# Altium PCB PCB.PcbDoc
Units mm, origin at the board's own origin, x right, y up, seen from the top; angles counter-clockwise.
Board outline 38 x 49 mm, 4 copper layers (Top, Signal Layer 1, Internal Plane 1, Bottom), stack 1.58 mm thick; 44 components, 33 nets, 157 pads, 156 vias.
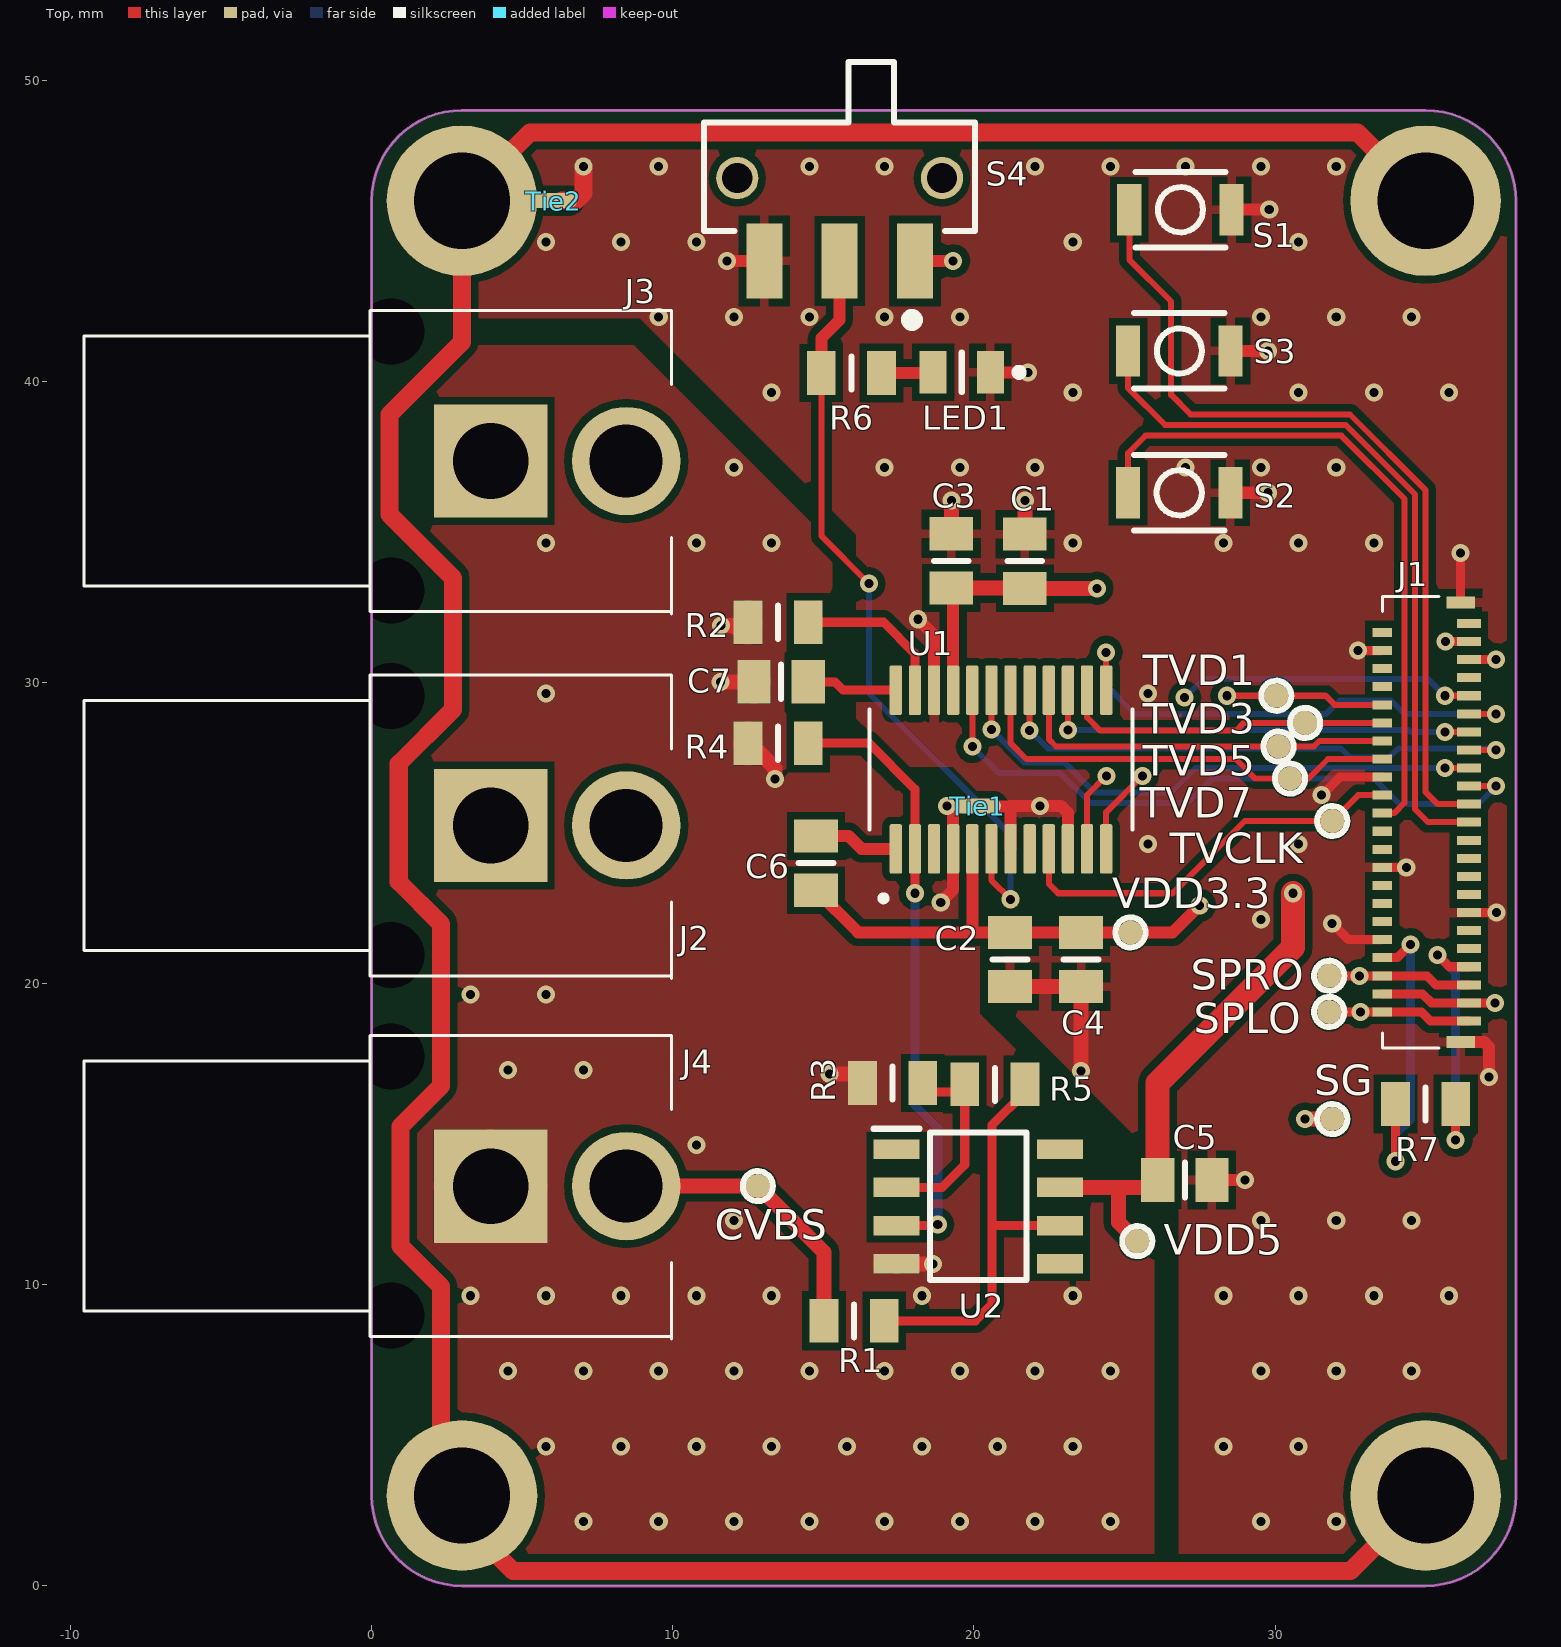
[diagram p0: Top view]
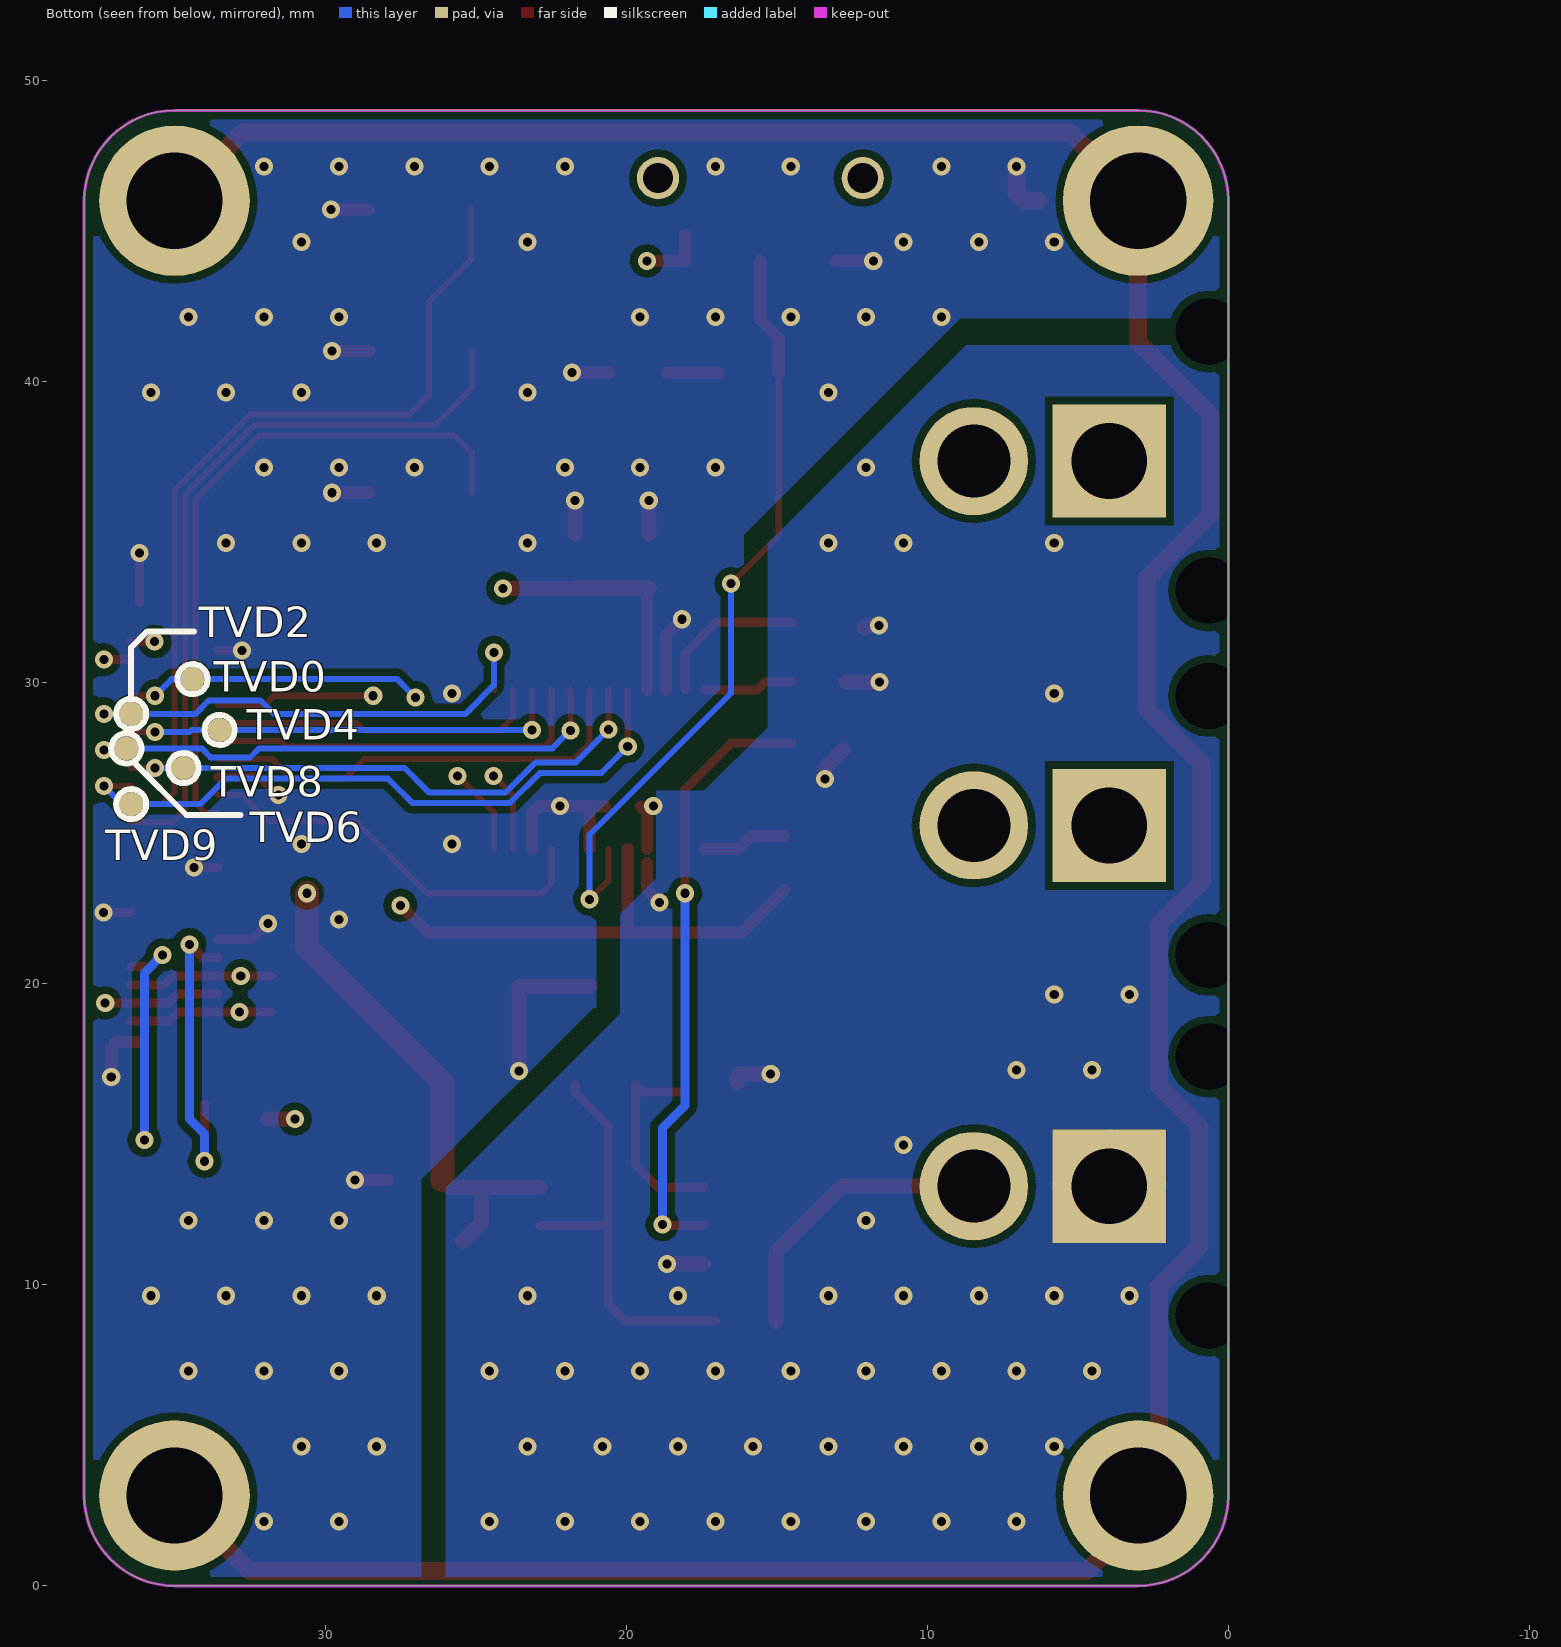
[diagram p1: Bottom view, seen from below]
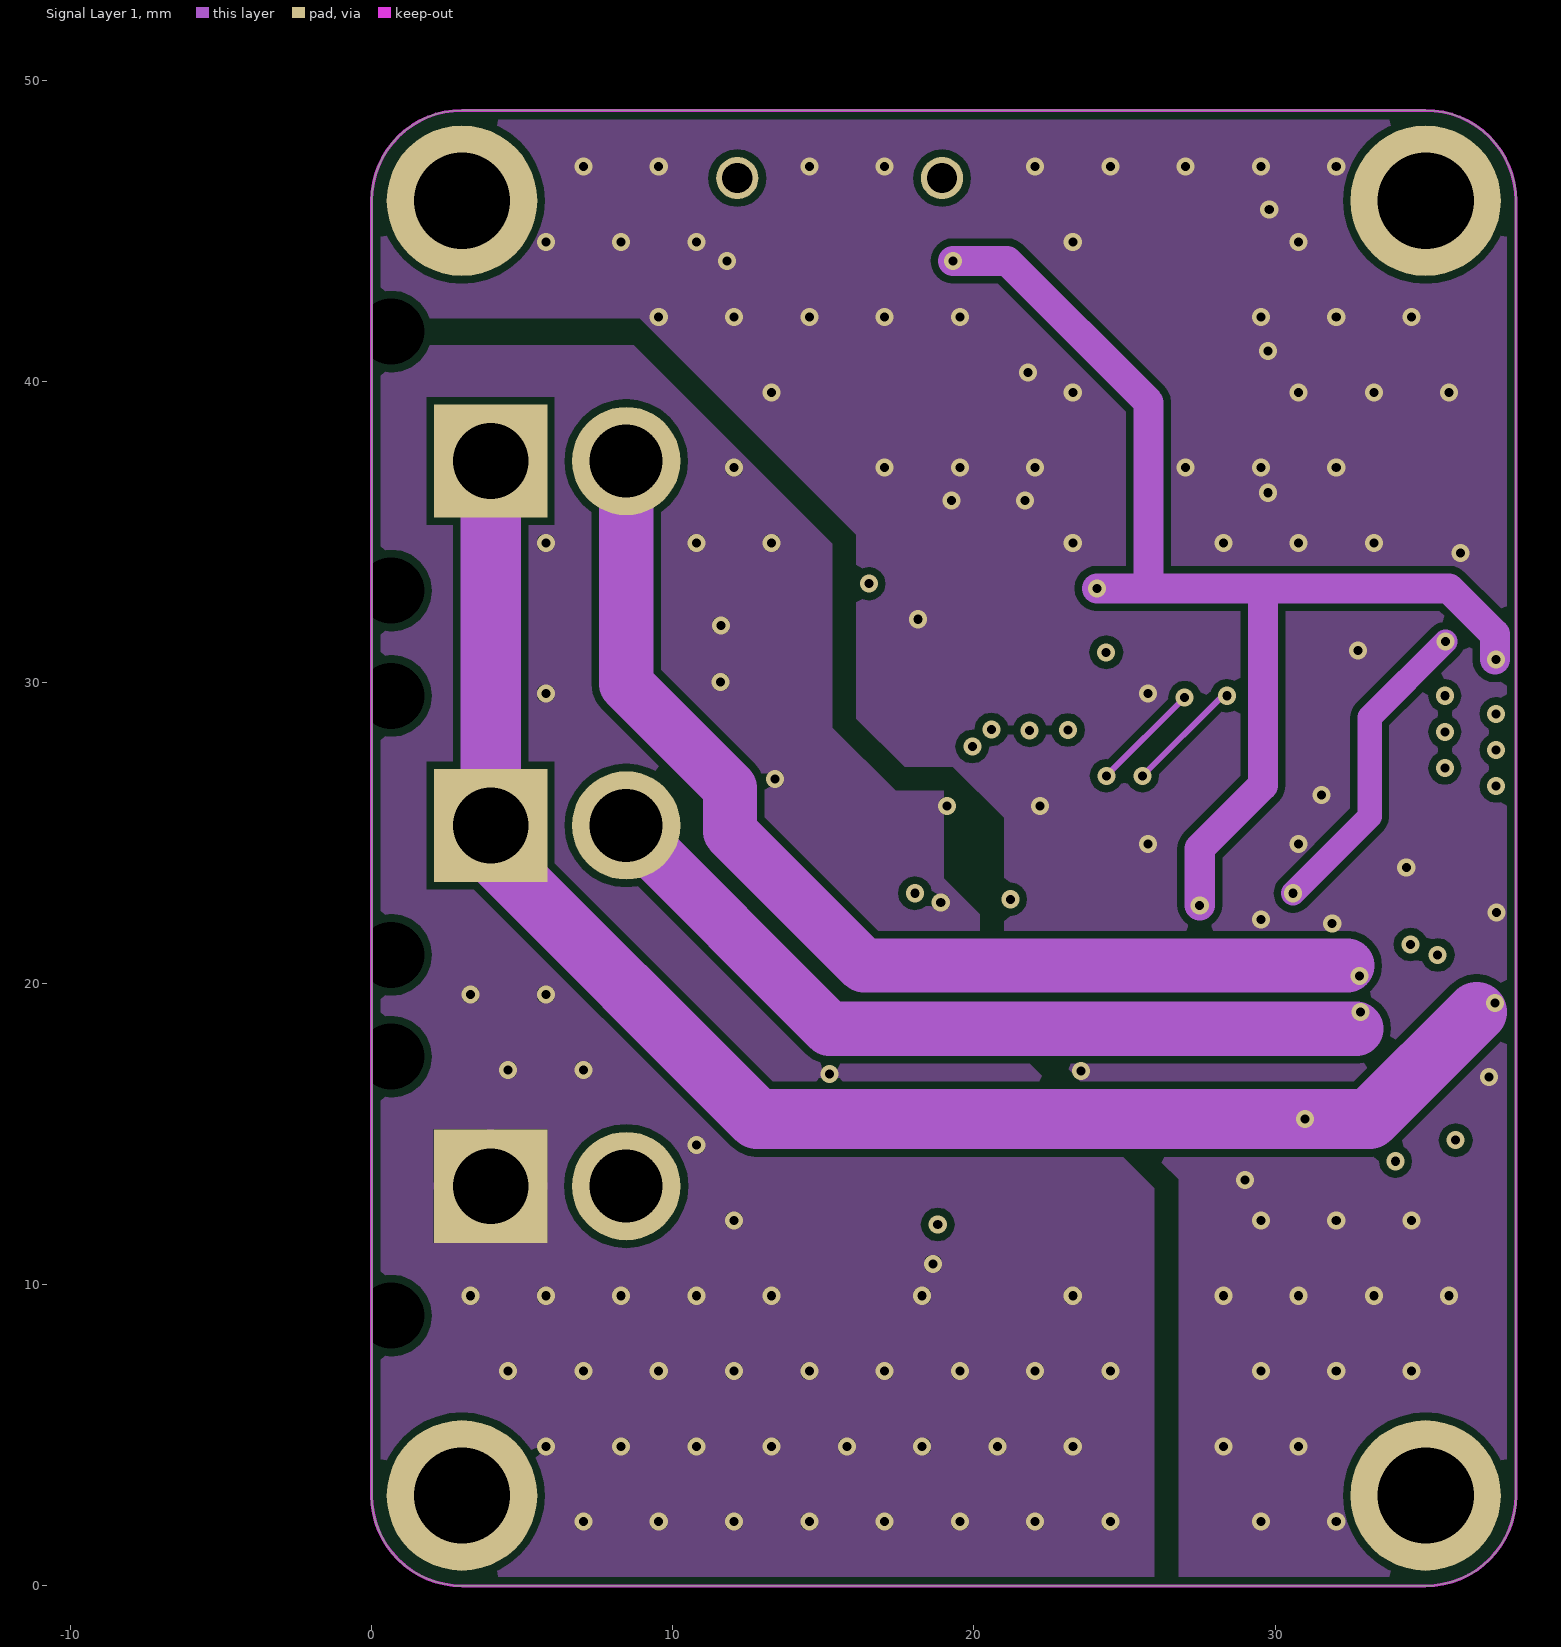
[diagram p2: Signal Layer 1]
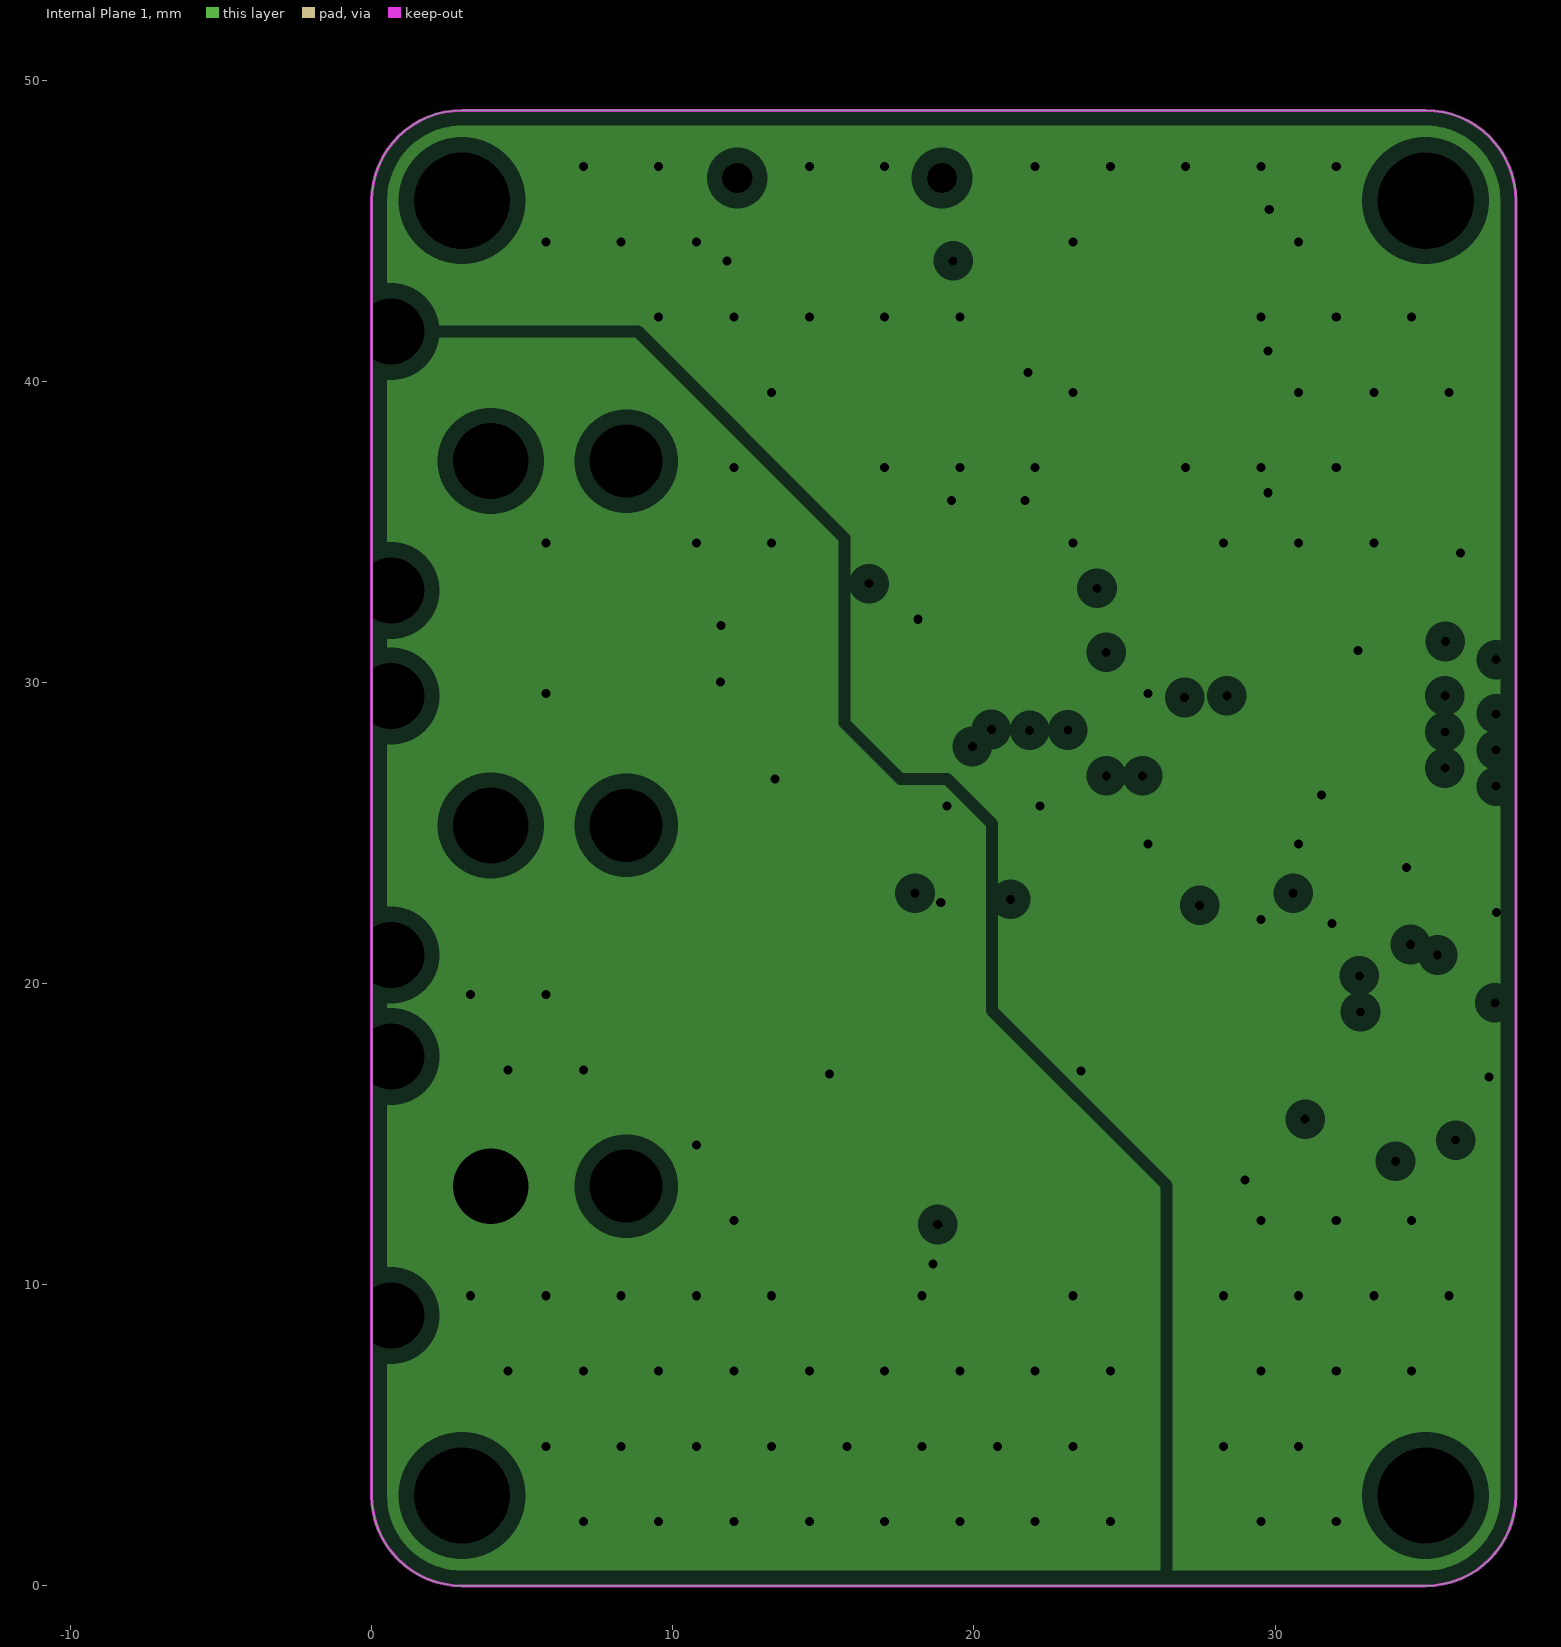
[diagram p3: Internal Plane 1, clearances drawn from the general rule]
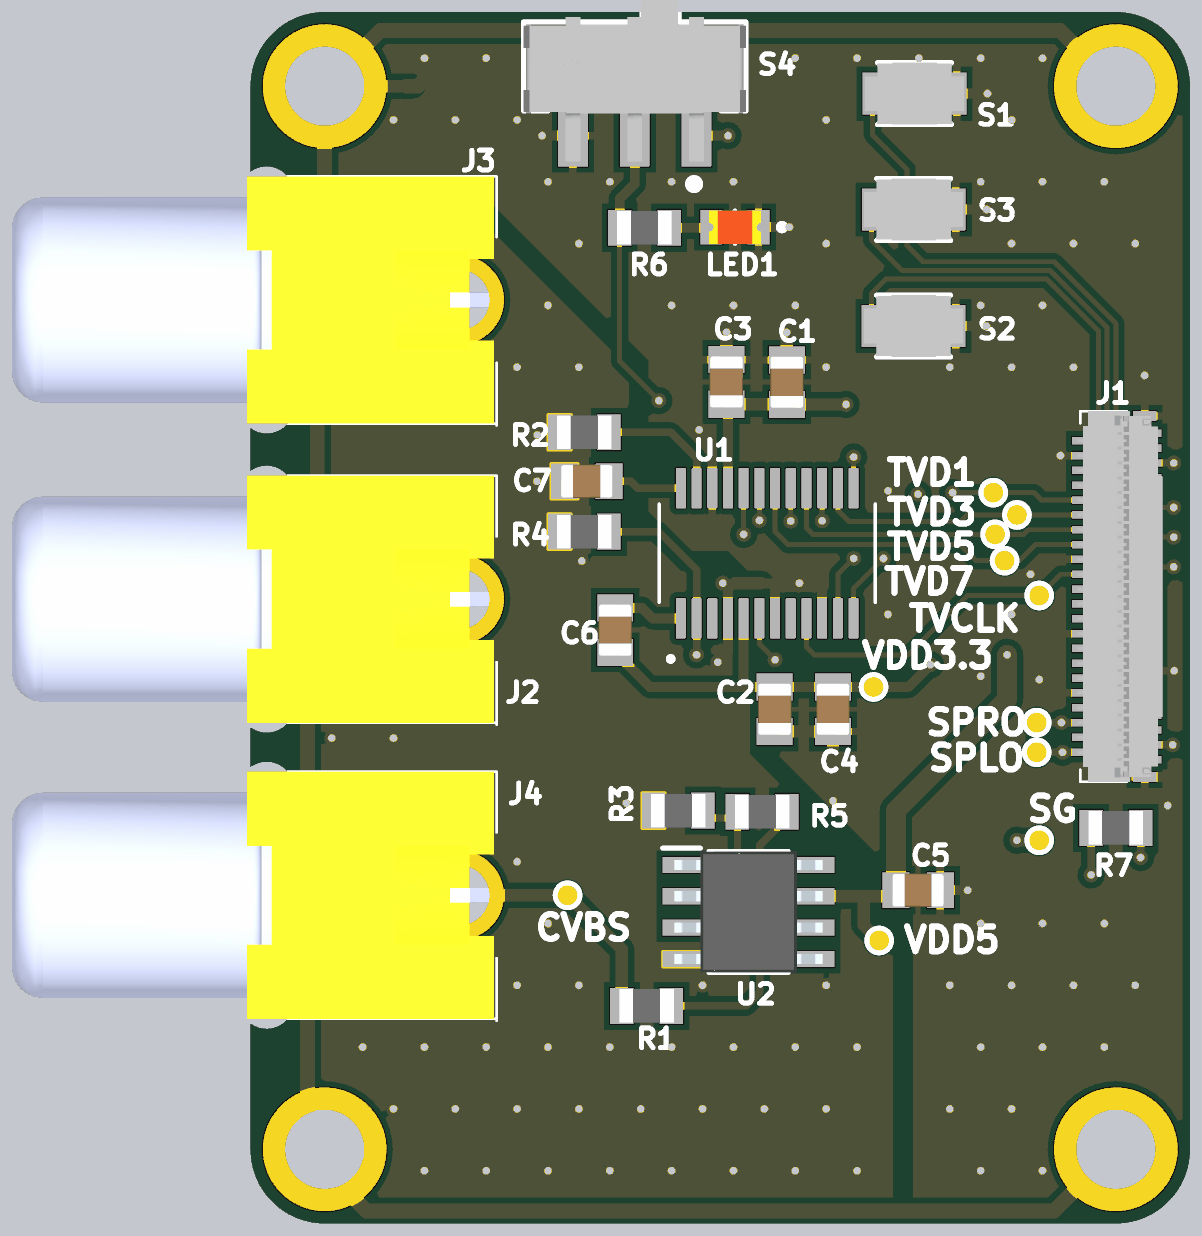
[diagram p4: 3D render of the assembled board from above, using the file's embedded part models]

## Layer stack, top to bottom
Top Solder: solder mask 0.01, Solder Resist, Dk 3.5
Top: signal copper 0.035
Dielectric 1: prepreg 0.22, FR-4, Dk 4.2
Signal Layer 1: signal copper 0.035
Dielectric 3: core 1, Dk 4.2
Internal Plane 1: plane copper 0.035, net (Multiple Nets)
Dielectric 2: prepreg 0.22, Dk 4.2
Bottom: signal copper 0.035
Bottom Solder: solder mask 0.01, Solder Resist, Dk 3.5

## Board outline
0,3 0,46 cw(c3,46) 3,49 35,49 cw(c35,46) 38,46 38,3 cw(c35,3) 35,0 3,0 cw(c3,3)

## Design rules (kind name [scope] priority, off if disabled: settings)
Clearance Clearance_Keep [IsPad vs OnLayer('Keep-Out Layer')] p1: gap=0 ignorepadtopadclearanceinfootprint=FALSE
Clearance [All] p2: gap=0.15 ignorepadtopadclearanceinfootprint=FALSE except(0.25: Arc-Poly Track-Poly SMDPad-Poly THPad-Poly Via-Poly Fill-Poly; 0.4: Poly-Poly)
ComponentClearance [All] p1 off: gap=0.254 collisioncheckmode=3 verticalgap=0.254 showdistances=FALSE
HoleSize [All] p1 off: absolutevalues=TRUE maxlimit=2.54 minlimit=0.025 maxpercent=80.000 minpercent=20.000
MinimumSolderMaskSliver [All] p1 off: minsoldermaskwidth=0.1
PlaneClearance [All] p1: clearance=0.508
PlaneConnect PlaneConnect_GND_M [InNet('GND_M')] p1: planeconnectstyle=Direct reliefexpansion=0.508 reliefentries=4 reliefconductorwidth=0.254 reliefairgap=0.254
PlaneConnect [All] p2: pad.planeconnectstyle=Relief pad.reliefexpansion=0.4 pad.reliefentries=4 pad.reliefconductorwidth=0.5 pad.reliefairgap=0.3 via.planeconnectstyle=Direct via.reliefexpansion=0.508 via.reliefentries=4 via.reliefconductorwidth=0.254 via.reliefairgap=0.254
PolygonConnect PolygonConnect_VBUS [InNet('VBUS')] p1: connectstyle=Direct reliefconductorwidth=0.3 reliefentries=4 polygonreliefangle="90 Angle" airgapwidth=0.25
PolygonConnect PolygonConnect_GND_M [InNet('GND_M')] p2: connectstyle=Direct reliefconductorwidth=0.3 reliefentries=4 polygonreliefangle="90 Angle" airgapwidth=0.25
PolygonConnect PolygonConnect_GND [InNet('GND')] p3: thpad.connectstyle=Relief thpad.reliefconductorwidth=0.3 thpad.reliefentries=4 thpad.polygonreliefangle="90 Angle" thpad.airgapwidth=0.25 smdpad.connectstyle=Relief smdpad.reliefconductorwidth=0.3 smdpad.reliefentries=4 smdpad.polygonreliefangle="90 Angle" smdpad.airgapwidth=0.25 via.connectstyle=Direct via.reliefconductorwidth=0.254 via.reliefentries=4 via.polygonreliefangle="90 Angle" via.airgapwidth=0.254
RoutingVias [All] p1: holewidth=0.711 width=1.27 viastyle="Through Hole" minholewidth=0.3 minwidth=0.6 maxholewidth=2 maxwidth=2
ShortCircuit [InComponent('Tie1') or InComponent('Tie2') vs InNet('GND')] p1: allowed=TRUE
ShortCircuit ShortCircuit_1 [All] p2: allowed=FALSE
SilkToSilkClearance [All] p1 off: silktosilkclearance=0.05
SilkToSolderMaskClearance [IsPad] p1 off: minsilkscreentomaskgap=0.05 clearancetoexposedcopper=TRUE
SolderMaskExpansion [All] p1: expansion=0.05
Width [All] p1: maxlimit=2 minlimit=0.15 preferedwidth=0.254
22 further rules are at their usual default settings.

## Components (designator, comment, footprint, x,y, rotation, side; value= is the part's Value field where it differs from the comment)
C1 "10uF" CAPC2012X90N 21.693,34.027 r90 top
C2 "10uF" CAPC2012X90N 21.2,20.8 r270 top
C3 "0.1uF" CAPC2012X90N 19.25,34.039 r90 top
C4 "0.1uF" CAPC2012X90N 23.559,20.8 r270 top
C5 "0.1uF" CAPC2012X90N 27.004,13.478 r0 top
C6 "0.1uF" CAPC2012X90N 14.755,24 r90 top
C7 "0.1uF" CAPC2012X90N 13.6,30.019 r180 top
CVBS "" Test_Point 12.825,13.275 r90 top
J1 "4-2328724-5" 423287245 35,25.359 r90 top locked
J2 "KLPX-0848A-2-W" KLPX0848A2RG 3.953,25.251 r0 top locked
J3 "KLPX-0848A-2-R" KLPX0848A2RG 3.953,37.354 r0 top locked
J4 "KLPX-0848A-2-Y" KLPX0848A2RG 3.953,13.275 r0 top locked
LED1 "GREEN" LED_OSRAM_LOR976 19.597,40.3 r180 top
R1 "Res1" RESC2012X50N 16.022,8.8 r0 top value=75R
R2 "Res1" RESC2012X50N 13.5,32 r0 top value=DNP
R3 "Res1" RESC2012X50N 17.3,16.7 r0 top value=430R
R4 "Res1" RESC2012X50N 13.5,27.983 r0 top value=DNP
R5 "Res1" RESC2012X50N 20.697,16.653 r180 top value=1k
R6 "Res1" RESC2012X50N 15.933,40.275 r180 top value=320R
R7 "Res1" RESC2012X50N 35,16 r180 top value=1k
S1 "B3U-1000P" B3U-1000P 26.86,45.7 r0 top
S2 "B3U-1000P" B3U-1000P 26.817,36.3 r0 top
S3 "B3U-1000P" B3U-1000P 26.824,41.012 r0 top
S4 "JS102011SAQN" JS102011SAQN 15.542,45 r180 top
SG "" Test_Point 31.9,15.5 r0 top
SPLO "" Test_Point 31.8,19.059 r90 top
SPRO "" Test_Point 31.8,20.259 r90 top
Tie1 "Tie" Tie 19.973,25.9 r0 top
Tie2 "Tie" Tie 5.896,46 r0 top
TVCLK "" Test_Point 31.9,25.4 r90 top
TVD0 "" Test_Point 34.4,30.109 r90 bottom
TVD1 "" Test_Point 30.042,29.559 r90 top
TVD2 "" Test_Point 36.438,28.959 r90 bottom
TVD3 "" Test_Point 31,28.659 r90 top
TVD4 "" Test_Point 33.5,28.422 r90 bottom
TVD5 "" Test_Point 30.116,27.872 r90 top
TVD6 "" Test_Point 36.6,27.809 r90 bottom
TVD7 "" Test_Point 30.5,26.809 r90 top
TVD8 "" Test_Point 34.7,27.159 r90 bottom
TVD9 "" Test_Point 36.438,25.959 r90 bottom
U1 "MAX5184BEEGT+" SOP63P602X175-24N 20.9,27.108 r90 top
U2 "MAX4414ESA+" SOIC127P600X175-8N 20.146,12.6 r0 top
VDD3.3 "" Test_Point 25.2,21.7 r90 top
VDD5 "" Test_Point 25.427,11.446 r90 top

## Footprints (in the part's own frame and the unit in brackets; to place one, negate y for a bottom-side part, rotate by r counter-clockwise, add the part's x,y. Pads: shape width x height; smd on the part's side, far side on the other; paste and mask are expansions set on the pad)
423287245 [mm]
  rect 0.3x0.8 smd: 1(-6.6,-1.438) 3(-6,-1.438) 5(-5.4,-1.438) 7(-4.8,-1.438) 9(-4.2,-1.438) 11(-3.6,-1.438) 13(-3,-1.438) 15(-2.4,-1.438) 17(-1.8,-1.438) 19(-1.2,-1.438) 21(-0.6,-1.438) 23(0,-1.438) 25(0.6,-1.438) 27(1.2,-1.438) 29(1.8,-1.438) 31(2.4,-1.438) 33(3,-1.438) 35(3.6,-1.438) 37(4.2,-1.438) 39(4.8,-1.438) 41(5.4,-1.438) 43(6,-1.438) 45(6.6,-1.438)
  rect 0.3x0.65 smd: 2(-6.3,1.438) 4(-5.7,1.438) 6(-5.1,1.438) 8(-4.5,1.438) 10(-3.9,1.438) 12(-3.3,1.438) 14(-2.7,1.438) 16(-2.1,1.438) 18(-1.5,1.438) 20(-0.9,1.438) 22(-0.3,1.438) 24(0.3,1.438) 26(0.9,1.438) 28(1.5,1.438) 30(2.1,1.438) 32(2.7,1.438) 34(3.3,1.438) 36(3.9,1.438) 38(4.5,1.438) 40(5.1,1.438) 42(5.7,1.438) 44(6.3,1.438)
  rect 0.4x0.95 smd: 46(-7.3,-1.163) 47(7.3,-1.163)
  silkscreen extent -7.5,-0.44 7.5,1.44, body extent -7.5,-1.9 7.5,1.58, height 1
B3U-1000P [mm]
  rect 0.8x1.7 smd: 1(-1.7,0) 2(1.7,0)
  silkscreen extent -1.5,-1.25 1.5,1.25, body extent -2,-1.25 2,1.25, height 1.6
CAPC2012X90N [mm] "Chip Capacitor, Body 2.0x1.25mm, IPC Medium Density"
  rect 1.1x1.45 smd: 1(-0.9,0) 2(0.9,0)
  silkscreen extent 0,-0.58 0,0.58, body extent -1.05,-0.67 1.05,0.68, height 0.9
JS102011SAQN [mm]
  rect 1.2x2.5 smd: 1(-2.5,1) 2(0,1) 3(2.5,1)
  round 1.4 hole 1: 4(-3.4,-1.75) 5(3.4,-1.75)
  silkscreen extent -4.5,-5.6 4.5,3.12, body extent -4.5,-5.45 4.5,2.05, height 3.62
KLPX0848A2RG [mm]
  round 0 hole 2.2 unplated: 0(-3.3,-4.3) 0(-3.3,4.3)
  rect 3.765x3.765 hole 2.51: 1(0,0)
  round 3.6 hole 2.42: 2(4.5,0)
  silkscreen extent -13.5,-5.08 6,5, body extent -13.6,-5 6,5, height 11.5
LED_OSRAM_LOR976 [mm] "Orange Chip LED, 2-Leads, Body 2.0x1.25mm, IPC Medium Density"
  rect 0.9x1.4 smd: 1(0.95,0) 2(-0.95,0)
  silkscreen extent -2.02,-0.65 0,0.65, body extent -1.05,-0.67 1.05,0.68, height 0.9
RESC2012X50N [mm] "Chip Resistor, EIA 0805, Metric 2012, Body 2.0x1.25mm, IPC Medium Density"
  rect 0.95x1.45 smd: 1(-1,0) 2(1,0)
  silkscreen extent 0,-0.55 0,0.55, body extent -1.1,-0.67 1.1,0.68, height 0.5
SOIC127P600X175-8N [mm]
  rect 1.525x0.65 smd: 1(-2.712,1.905) 2(-2.712,0.635) 3(-2.712,-0.635) 4(-2.712,-1.905) 5(2.712,-1.905) 6(2.712,-0.635) 7(2.712,0.635) 8(2.712,1.905)
  silkscreen extent -3.47,-2.45 1.6,2.58, body extent -3,-2.45 3,2.45, height 1.75
SOP63P602X175-24N [mm]
  rrect25% 1.64x0.41 smd: 1(-2.635,3.492) 2(-2.635,2.857) 3(-2.635,2.222) 4(-2.635,1.587) 5(-2.635,0.952) 6(-2.635,0.317) 7(-2.635,-0.318) 8(-2.635,-0.953) 9(-2.635,-1.588) 10(-2.635,-2.222) 11(-2.635,-2.857) 12(-2.635,-3.492) 13(2.635,-3.492) 14(2.635,-2.857) 15(2.635,-2.222) 16(2.635,-1.587) 17(2.635,-0.952) 18(2.635,-0.317) 19(2.635,0.318) 20(2.635,0.953) 21(2.635,1.588) 22(2.635,2.222) 23(2.635,2.857) 24(2.635,3.492)
  silkscreen extent -4.37,-4.37 1.99,4.37
Test_Point [mm]
  round 0.8 smd paste-1: 1(0,0)
  silkscreen extent -0.5,-0.5 0.5,0.5
Tie [mm]
  oval 1x0.5 smd paste-1: 1(-0.127,0) 2(0.427,0)

## Part data
C1 C2 C3 C4 C5 C6 C7: library part Cap, "Capacitor", LatestRevisionDate=17-Jul-2002, LatestRevisionNote="Re-released for DXP Platform.", PackageDescription="Radial Cap, Thru-Hole; 2 Leads; 0.3 in Pin Spacing", PackageReference=RAD-0.3, Published=8-Jun-2000, Publisher="Altium Limited"
CVBS SG SPLO SPRO TVCLK TVD0 TVD1 TVD2 TVD3 TVD4 TVD5 TVD6 TVD7 TVD8 TVD9 VDD3.3 VDD5: library part TP_P0_0.8_D0, "Test Point"
J1: "Connector", Manufacturer_Name="TE Connectivity", Mouser Part Number=571-4-2328724-5, Arrow Part Number=4-2328724-5, Arrow Price/Stock=https://www.arrow.com/en/products/4-2328724-5/te-connectivity, Datasheet Link=https://www.te.com/commerce/DocumentDelivery/DDEController?Action=showdoc&DocId=Customer+Drawing%7F2328724%7F3%7Fpdf%7FEnglish%7FENG_CD_2328724_3.pdf%7F4-2328724-5, Height=1.1mm, Manufacturer_Part_Number=4-2328724-5, Mouser Price/Stock=https://www.mouser.co.uk/ProductDetail/TE-Connectivity/4-2328724-5/?qs=w%2Fv1CP2dgqow3y3efq3sig%3D%3D
J2 J3 J4: library part KLPX-0848A-2-R-G, "Connector", Manufacturer_Name=Kycon, Mouser Part Number=806-KLPX-0848A-2RG, Datasheet Link=http://pdf.datasheet.su/kycon/klpx-0848a-2-o.pdf, Height=13mm, Manufacturer_Part_Number=KLPX-0848A-2-R-G, Mouser Price/Stock=https://www.mouser.co.uk/ProductDetail/Kycon/KLPX-0848A-2-R-G?qs=OD9TCanM70Aq6%252BNVnl7Mvg%3D%3D
LED1: library part LED0, "LED GREEN CLEAR 0603 SMD", Manufacturer="Lite-On Inc.", Manufacturer PN=LTST-C191KRKT, PackageDescription="LED; 2 Leads", PackageReference=LED-0, Published=8-Jun-2000, Publisher="Altium Limited"
R1 R2 R3 R4 R5 R6 R7: "Resistor", LatestRevisionDate=17-Jul-2002, LatestRevisionNote="Re-released for DXP Platform.", PackageDescription="Axial Device, Thru-Hole; 2 Leads; 0.3 in Pin Spacing", PackageReference=AXIAL-0.3, Published=8-Jun-2000, Publisher="Altium Limited"
S1 S2 S3: library part SW-PB, "Switch", LatestRevisionDate=17-Jul-2002, LatestRevisionNote="Re-released for DXP Platform.", PackageDescription="Switch; 2 Leads", PackageReference=SPST-2, Published=24-Mar-1999, Publisher="Altium Limited"
S4: library part SW-SPDT, "SPDT Subminiature Toggle Switch, Right Angle Mounting, Vertical Actuation"
U1: library part MAX5184BEEGT, Package=None, Availability=Unavailable, MP=MAX5184BEEGT, Price=None
U2: "Integrated Circuit", Manufacturer_Name="Maxim Integrated", Mouser Part Number=700-MAX4414ESA, Datasheet Link=https://datasheet.datasheetarchive.com/originals/dk/DKDS-7/136984.pdf, Height=1.75mm, Manufacturer_Part_Number=MAX4414ESA+, Mouser Price/Stock=https://www.mouser.co.uk/ProductDetail/Maxim-Integrated/MAX4414ESA%2b?qs=1eQvB6Dk1vgudhnIKtrMFQ%3D%3D

## Free pads (board coordinates)
  round 5 hole 3.2: 0(3,3) 0(3,46) 0(35,3) 0(35,46)

## Via types
v1: diameter 0.6, hole 0.3, Top to Bottom, tented both sides, 156 vias

## Nets (pads, with @x,y where several pads share a name; then routed paths per layer and width w, separated by ;. In a path a pad name is that pad's centre, name@x,y a point inside that pad or via, vN(x,y) a via of type N, cw(c..) or ccw(c..) an arc to the next point about the centre after c; other vN are vias at no path point)
+3.3V: C1.1 C2.1 C3.1 C4.1 C6.1 J1.41 S4.1 U1.5 U1.21 VDD3.3.1 | length 69.6
  Top w0.3: J1.41 v1(37.341,30.759)
  Top w0.4: C6.1 16.155,21.7 C2.1 ; S4.1@18.042,44.858 S4.1 v1(19.313,44) ; C3.1 19.312,33.076 U1.21 ; U1.5 19.947,21.7 C2.1 ; v1(27.5,22.6) 26.6,21.7 VDD3.3.1 C4.1 C2.1
  Top w0.5: C3.1 21.681,33.139 C1.1 v1(24.087,33.127)
  Signal Layer 1 w1: v1(19.313,44) 21.1,44 25.8,39.3 25.8,33.127 ; v1(24.087,33.127) 25.8,33.127 ; v1(27.5,22.6) 27.5,24.488 29.6,26.588 29.6,33 ; v1@37.3,30.759 37.3,31.6 35.773,33.127 25.8,33.127
+5V: C5.1 J1.43 U2.7 VDD5.1 | length 28
  Top w0.3: v1(35.659,31.359) J1.43
  Top w0.5: U2.7 24.8,13.235 ; VDD5.1 24.8,12.073 24.8,13.235 ; C5.1 25.861,13.235 24.8,13.235
  Top w0.8: C5.1 26.104,16.704 30.6,21.2 v1(30.6,23)
  Signal Layer 1 w0.8: v1(30.6,23) 33.146,25.546 33.146,28.846 v1(35.659,31.359)
AGND: C7.2 J4.1 R2.1 R3.1 R4.1 Tie1.1 U1.4 U2.4 | length 8.4
  Top w0.4: v1(18.9,22.7) 19.312,23.112 U1.4@19.312,24 ; U1.4 19.312,25.695 Tie1.1@19.5,25.883
  Top w0.5: v1(11.59,30.019) C7.2 ; v1(11.6,31.893) 12.017,31.893 R2.1@12.1,31.81 ; R4.1@12.8,27.759 13.4,27.159 v1(13.4,26.8) ; v1(15.2,17) 16.255,17 16.3,16.955 R3.1 ; U2.4 v1(18.642,10.695)
  other v1: 7.034,2.134 9.534,2.134 12.034,2.134 14.534,2.134 17.034,2.134 19.534,2.134 22.034,2.134 24.534,2.134 5.784,4.634 8.284,4.634 10.784,4.634 13.284,4.634 15.784,4.634 18.284,4.634 20.784,4.634 23.284,4.634 4.534,7.134 7.034,7.134 9.534,7.134 12.034,7.134 14.534,7.134 17.034,7.134 19.534,7.134 22.034,7.134 24.534,7.134 3.284,9.634 5.784,9.634 8.284,9.634 10.784,9.634 13.284,9.634 18.284,9.634 23.284,9.634 12.034,12.134 10.784,14.634 4.534,17.134 7.034,17.134 3.284,19.634 5.784,19.634 19.1,25.9 5.784,29.634 5.784,34.634 10.784,34.634 13.284,34.634 12.034,37.134
CVBS: CVBS.1 J4.2 R1.1 | length 9.8
  Top w0.5: J4.2 10.771,13.275 CVBS.1 15.022,11.078 R1.1
DACEN: R6.2 S4.2 U1.6 | length 26
  Top w0.2: R6.2 14.933,34.867 v1(16.517,33.283) ; U1.6 20.582,23.435 v1(21.217,22.8)
  Top w0.4: R6.2 14.933,41.433 15.542,42.042 S4.2
  Bottom w0.2: v1(16.517,33.283) 16.517,29.645 21.217,24.945 v1(21.217,22.8)
GND: C1.2 C2.2 C3.2 C4.2 C5.2 J1.10 J1.13 J1.18 J1.28 J1.42 J1.46 J1.47 LED1.2 S1.2 S2.2 S3.2 S4.3 Tie1.2 Tie2.2 U1.7 U1.10 U1.22 | length 34.5
  Top w0.3: v1@31.502,26.259 v1(31.549,26.259) 32.149,26.859 J1.28 ; v1(31.9,22) 32.441,21.459 J1.10 ; v1(32.759,31.059) J1.42 ; J1.18 v1(34.359,23.859) ; J1.47 v1(36.163,34.3) ; J1.13 v1(37.359,22.359)
  Top w0.4: v1(11.794,44) S4.3 ; v1(18.144,32.1) 18.678,31.567 U1.22 ; LED1.2 v1(21.795,40.3) ; Tie1.2@20.696,25.9 20.713,25.883 21.217,25.883 ; U1.7 21.217,25.883 ; U1.10 23.122,25.678 22.9,25.9 v1(22.2,25.9) 21.2,25.9 21.217,25.883 ; C5.2 v1(29.006,13.478) ; S2.2 v1(29.766,36.3) ; S3.2 v1(29.772,41.012) ; S1.2 v1(29.808,45.7) ; J1.46 36.941,18.059 37.1,17.9 v1(37.1,16.9)
  Top w0.5: C3.2 v1(19.25,36.05) ; C2.2 C4.2 v1(23.559,17.1) ; C1.2 v1(21.693,36.037)
  Top w0.6: Tie2.2 6.784,46 7.034,46.25 v1(7.034,47.134)
  other v1: 29.534,2.134 32.034,2.134 28.284,4.634 30.784,4.634 29.534,7.134 32.034,7.134 34.534,7.134 28.284,9.634 30.784,9.634 33.284,9.634 35.784,9.634 29.534,12.134 32.034,12.134 34.534,12.134 29.534,22.134 25.784,24.634 30.784,24.634 25.784,29.634 23.284,34.634 28.284,34.634 30.784,34.634 33.284,34.634 17.034,37.134 19.534,37.134 22.034,37.134 27.034,37.134 29.534,37.134 32.034,37.134 13.284,39.634 23.284,39.634 30.784,39.634 33.284,39.634 35.784,39.634 9.534,42.134 12.034,42.134 14.534,42.134 17.034,42.134 19.534,42.134 29.534,42.134 32.034,42.134 34.534,42.134 5.784,44.634 8.284,44.634 10.784,44.634 23.284,44.634 30.784,44.634 9.534,47.134 14.534,47.134 17.034,47.134 22.034,47.134 24.534,47.134 27.034,47.134 29.534,47.134 32.034,47.134
LEDA2: J1.8 R7.2 | length 10.4
  Top w0.3: J1.8 34.059,20.859 v1(34.5,21.3) ; v1(34,14.1) R7.2
  Bottom w0.3: v1(34,14.1) 34,15 34.5,15.5 v1(34.5,21.3)
LEDC2: J1.7 R7.1 | length 8.8
  Top w0.3: v1(35.4,20.951) 35.792,20.559 J1.7 ; v1(36,14.8) R7.1
  Bottom w0.3: v1(35.4,20.951) 36,20.351 v1(36,14.8)
NetC6_2: C6.2 U1.1 | length 2.8
  Top w0.4: C6.2 15.842,24.9 16.269,24.473 U1.1
NetC7_1: C7.1 U1.24 | length 3
  Top w0.3: C7.1 15.381,30.019 15.657,29.743 U1.24
NetLED1_1: LED1.1 R6.1 | length 1.7
  Top w0.4: R6.1 18.622,40.275 LED1.1
NetR1_2: R1.2 R5.1 U2.6 | length 13.8
  Top w0.3: R1.2 20.047,8.8 20.6,9.353 20.6,12 ; R5.1 21.697,16.397 20.6,15.3 20.6,12 ; U2.6 20.635,11.965 20.6,12
NetR2_2: R2.2 U1.23 | length 5.2
  Top w0.3: R2.2 17,32 18.042,30.958 U1.23
NetR3_2: R3.2 R5.2 U2.2 | length 6.9
  Top w0.3: U2.2 18.947,13.235 19.697,13.985 R5.2 19.444,16.4 R3.2@18.144,16.4
NetR4_2: R4.2 U1.2 U2.3 | length 20.3
  Top w0.3: R4.2 16.517,27.983 18.042,26.458 U1.2 v1(18.042,23) ; U2.3 18.765,11.965 v1(18.8,12)
  Bottom w0.3: v1(18.042,23) 18.042,15.958 18.8,15.2 v1(18.8,12)
P10: J1.25 S1.1 | length 28.1
  Top w0.2: S1.1 25.16,44.04 26.55,42.65 26.55,39.55 27.2,38.9 32.49,38.9 35,36.39 35,26.36 35.401,25.959 J1.25
P11: J1.24 S2.1 | length 22.6
  Top w0.2: S2.1 25.117,37.617 25.7,38.2 32.2,38.2 34.3,36.1 34.3,26 33.959,25.659 J1.24
P12: J1.23 S3.1 | length 24.6
  Top w0.2: S3.1 25.124,39.776 26.35,38.55 32.345,38.55 34.65,36.245 34.65,25.791 35.082,25.359 J1.23
SG: J1.3 J1.4 J2.1 J3.1 SG.1 | length 55.7
  Top w0.3: J1.4 34.897,19.659 35.197,19.359 J1.3 v1(37.3,19.359)
  Top w0.5: v1(31,15.5) SG.1
  Signal Layer 1 w2: J3.1 J2.1 3.953,24.347 12.8,15.5 v1(31,15.5) 33.141,15.5 36.7,19.059
SHD: pad.0 Tie2.1 | length 116
  Top w0.6: pad.0@35,3 32.5,0.5 4.7,0.5 3,2.2 3,3 2.3,3.7 2.3,9.948 0.959,11.289 0.959,15.259 2.3,16.6 2.3,21.982 0.9,23.382 0.9,27.3 2.7,29.1 2.7,33.475 0.6,35.575 0.6,38.9 3,41.3 3,46 5.258,48.258 32.742,48.258 pad.0@35,46
SPLO: J1.1 J1.2 J2.2 SPLO.1 | length 31.8
  Top w0.3: SPLO.1 v1(32.841,19.059) J1.2 34.86,19.059 35.16,18.759 J1.1
  Signal Layer 1 w1.8: J2.2 15.204,18.5 32.7,18.5
SPRO: J1.5 J1.6 J3.2 SPRO.1 | length 40.8
  Top w0.3: SPRO.1 v1(32.8,20.259) J1.6 35.041,20.259 35.341,19.959 J1.5
  Signal Layer 1 w1.8: J3.2 8.453,29.947 11.9,26.5 11.9,25.049 16.349,20.6 32.4,20.6
TVCLK: J1.26 TVCLK.1 U1.9 | length 13.7
  Top w0.2: U1.9 22.487,23.313 22.8,23 26.6,23 29,25.4 TVCLK.1 32.759,26.259 J1.26
TVDATA0: J1.37 TVD0.1 U1.11 | length 16.3
  Top w0.2: U1.11 23.757,26.257 v1(24.4,26.9) ; v1(35.641,29.559) J1.37
  Signal Layer 1 w0.2: v1(24.4,26.9) v1(27,29.5)
  Bottom w0.2: v1(27,29.5) 27.609,30.109 35.091,30.109 v1(35.641,29.559)
TVDATA1: J1.36 TVD1.1 U1.12 | length 12.2
  Top w0.2: U1.12 24.392,25.692 v1(25.6,26.9) ; v1@28.341,29.559 v1(28.4,29.559) 31.684,29.559 31.984,29.259 J1.36
  Signal Layer 1 w0.2: v1(25.6,26.9) 28.259,29.559 v1(28.4,29.559)
TVDATA2: J1.35 TVD2.1 U1.13 | length 17
  Top w0.2: U1.13 v1(24.392,31) ; J1.35 v1(37.341,28.959)
  Bottom w0.2: v1(24.392,31) 24.392,29.907 25.35,28.95 29.641,28.95 29.65,28.959 31.7,28.959 32.141,29.4 33.859,29.4 34.3,28.959 TVD2.1 v1(37.341,28.959)
TVDATA3: J1.34 TVD3.1 U1.14 | length 11
  Top w0.2: U1.14 23.757,28.843 24.2,28.4 28.706,28.4 28.965,28.659 J1.34
TVDATA4: J1.33 TVD4.1 U1.15 | length 14.7
  Top w0.2: v1(23.122,28.422) U1.15 ; v1(35.641,28.359) J1.33
  Bottom w0.2: v1(23.122,28.422) 34.436,28.422 34.5,28.359 v1(35.641,28.359)
TVDATA5: J1.32 TVD5.1 U1.16 | length 12.9
  Top w0.2: U1.16 22.487,28.113 22.728,27.872 TVD5.1 31.29,27.872 31.476,28.059 J1.32
TVDATA6: J1.31 TVD6.1 U1.17 | length 18.2
  Top w0.2: v1(21.852,28.411) U1.17 ; J1.31 v1(37.341,27.759)
  Bottom w0.2: v1(21.852,28.411) 22.455,27.809 32.191,27.809 32.491,27.509 33.8,27.509 34.1,27.809 TVD6.1 37.291,27.809 v1(37.341,27.759)
TVDATA7: J1.30 TVD7.1 U1.18 | length 14.9
  Top w0.2: U1.18 21.217,27.983 21.741,27.459 28.7,27.459 29.35,26.809 31.109,26.809 31.759,27.459 J1.30
TVDATA8: J1.29 TVD8.1 U1.19 | length 18.4
  Top w0.2: v1(20.582,28.44) U1.19 ; v1(35.641,27.159) J1.29
  Bottom w0.2: v1(20.582,28.44) 21.672,27.35 23.003,27.35 24.003,26.35 26.55,26.35 27.359,27.159 v1(35.641,27.159)
TVDATA9: J1.27 TVD9.1 U1.20 | length 21.9
  Top w0.2: v1(19.947,27.872) U1.20 ; J1.27 v1(37.341,26.559)
  Bottom w0.2: v1(19.947,27.872) 20.82,27 22.858,27 23.858,26 27.1,26 27.909,26.809 33.291,26.809 34.141,25.959 36.741,25.959 v1(37.341,26.559)
pads on no net: J1.9 J1.11 J1.12 J1.14 J1.15 J1.16 J1.17 J1.19 J1.20 J1.21 J1.22 J1.38 J1.39 J1.40 J1.44 J1.45 J2.0 J3.0 J4.0 S4.4 S4.5 U1.3 U1.8 U2.1 U2.5 U2.8

## Polygon pours and split planes (outlines as drawn)
GND on Top "GND_L01_P028" (solid, remove dead copper, pour order 28): 0,42.1 8.9,42.1 16.1,34.9 16.1,28.8 17.7,27.2 19.3,27.2 21,25.5 21,19.2 21.1,19.2 26.8,13.5 26.8,0 38,0 39.4,1.4 39.4,48.6 36.3,51.7 0.2,51.7 -0.9,50.6
AGND on Top "AGND_L01_P030" (solid, remove dead copper, pour order 30): 0,41.2 8.7,41.2 15.3,34.6 15.3,28.5 17.4,26.4 19,26.4 19,23.499 20.2,22.299 20.2,19 25.996,13.204 25.996,0.004 26,0 0,0
AGND on Signal Layer 1 "AGND_L02_P032" (solid, remove dead copper, pour order 32): 0,41.2 8.7,41.2 15.3,34.6 15.3,28.5 17.4,26.4 19,26.4 19,23.499 20.2,22.299 20.2,19 25.996,13.204 25.996,0.004 26,0 0,0
GND on Signal Layer 1 "GND_L02_P038" (solid, remove dead copper, pour order 38): 0,42.1 8.9,42.1 16.1,34.9 16.1,28.8 17.7,27.2 19.3,27.2 21,25.5 21,19.2 21.1,19.2 26.8,13.5 26.8,0 38,0 39.4,1.4 39.4,48.6 36.3,51.7 0.2,51.7 -0.9,50.6
GND on Bottom "GND_L04_P034" (solid, remove dead copper, pour order 34): 0,42.1 8.9,42.1 16.1,34.9 16.1,28.8 17.7,27.2 19.3,27.2 21,25.5 21,19.2 21.1,19.2 26.8,13.5 26.8,0 38,0 39.4,1.4 39.4,48.6 36.3,51.7 0.2,51.7 -0.9,50.6
AGND on Bottom "AGND_L04_P036" (solid, remove dead copper, pour order 36): 0,41.2 8.7,41.2 15.3,34.6 15.3,28.5 17.4,26.4 19,26.4 19,23.499 20.2,22.299 20.2,19 25.996,13.204 25.996,0.004 26,0 0,0
AGND on Internal Plane 1 (split plane): 0.552,41.479 0.601,41.459 0.653,41.452 8.762,41.452 15.498,34.716 15.498,28.659 15.505,28.607 15.525,28.558 15.557,28.516 17.416,26.657 17.44,26.639 17.458,26.625 17.478,26.617 17.507,26.605 17.559,26.598 19.023,26.598 20.398,25.223 20.398,19.1 20.405,19.048 20.425,18.999 20.457,18.957 26.198,13.216 26.198,0.51 3,0.51 2.984,0.509 2.783,0.518 2.567,0.546 2.355,0.593 2.148,0.658 1.947,0.742 1.754,0.842 1.571,0.959 1.398,1.091 1.238,1.238 1.091,1.398 0.959,1.571 0.842,1.754 0.742,1.947 0.658,2.148 0.593,2.355 0.546,2.567 0.518,2.783 0.509,2.984 0.51,3 0.51,41.511
GND on Internal Plane 1 (split plane): 35.217,48.482 35.433,48.454 35.645,48.407 35.852,48.342 36.053,48.258 36.246,48.158 36.429,48.041 36.602,47.909 36.762,47.762 36.909,47.602 37.041,47.429 37.158,47.246 37.258,47.053 37.342,46.852 37.407,46.645 37.454,46.433 37.482,46.217 37.491,46.016 37.49,46 37.49,3 37.491,2.984 37.482,2.783 37.454,2.567 37.407,2.355 37.342,2.148 37.258,1.947 37.158,1.754 37.041,1.571 36.909,1.398 36.762,1.238 36.602,1.091 36.429,0.959 36.246,0.842 36.053,0.742 35.852,0.658 35.645,0.593 35.433,0.546 35.217,0.518 35.016,0.509 35,0.51 26.602,0.51 26.602,13.3 26.595,13.352 26.583,13.381 26.575,13.401 26.543,13.443 20.802,19.184 20.802,25.306 20.795,25.359 20.775,25.407 20.743,25.449 19.249,26.943 19.207,26.975 19.159,26.995 19.106,27.002 17.643,27.002 15.902,28.743 15.902,34.8 15.895,34.852 15.875,34.901 15.843,34.943 8.989,41.797 8.947,41.829 8.898,41.849 8.846,41.856 0.653,41.856 0.601,41.849 0.552,41.829 0.51,41.797 0.51,46 0.509,46.016 0.518,46.217 0.546,46.433 0.593,46.645 0.658,46.852 0.742,47.053 0.842,47.246 0.959,47.429 1.091,47.602 1.238,47.762 1.398,47.909 1.571,48.041 1.754,48.158 1.947,48.258 2.148,48.342 2.355,48.407 2.567,48.454 2.783,48.482 2.984,48.491 3,48.49 35,48.49 35.016,48.491

## Keep-outs
Keep-Out Layer:
  the board outline again, w0.1

## Other copper
Internal Plane 1 (plane layer: these items are gaps in the copper):
  lines w0.4: 0.653,41.654 8.846,41.654 15.7,34.8 15.7,28.659 17.559,26.8 19.106,26.8 20.6,25.306 20.6,19.1 26.4,13.3 26.4,0

## Silkscreen, mask and mechanical layers (free items; w line width, h text height)
Bottom Overlay:
  lines w0.2: 32.8,25.6 34.6,25.6 36.3,27.3 36.3,27.4 ; 34.359,31.7 35.9,31.7 36.438,31.162 36.438,29.5

## Dimensions
-0.5,0 to 0,49 on Top Overlay
0,0 to 38,0.134 on Top Overlay